# Altium PCB hb.PcbDoc
Units mil, origin at the board's own origin, x right, y up, seen from the top; angles counter-clockwise.
Board outline 6000 x 4000 mil, 2 copper layers (Top Layer, Bottom Layer); 61 components, 62 nets, 221 pads, 20 vias.
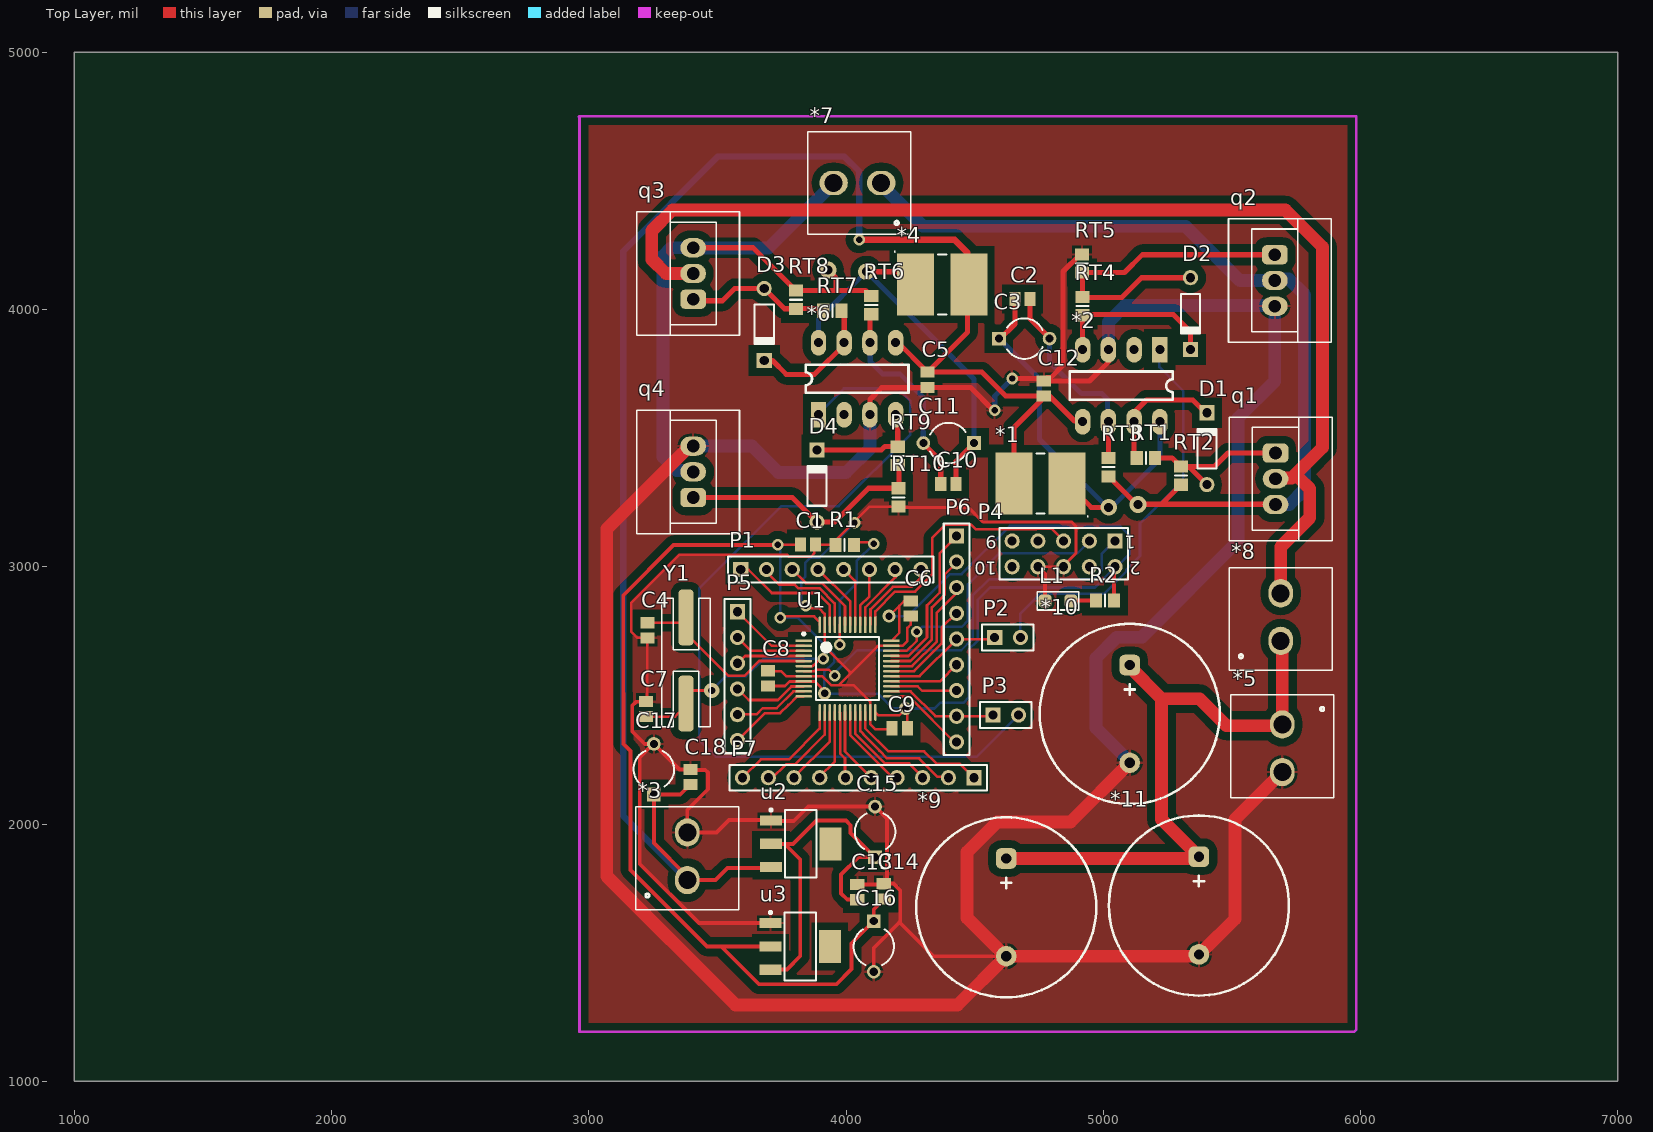
[diagram p0: Top Layer view]
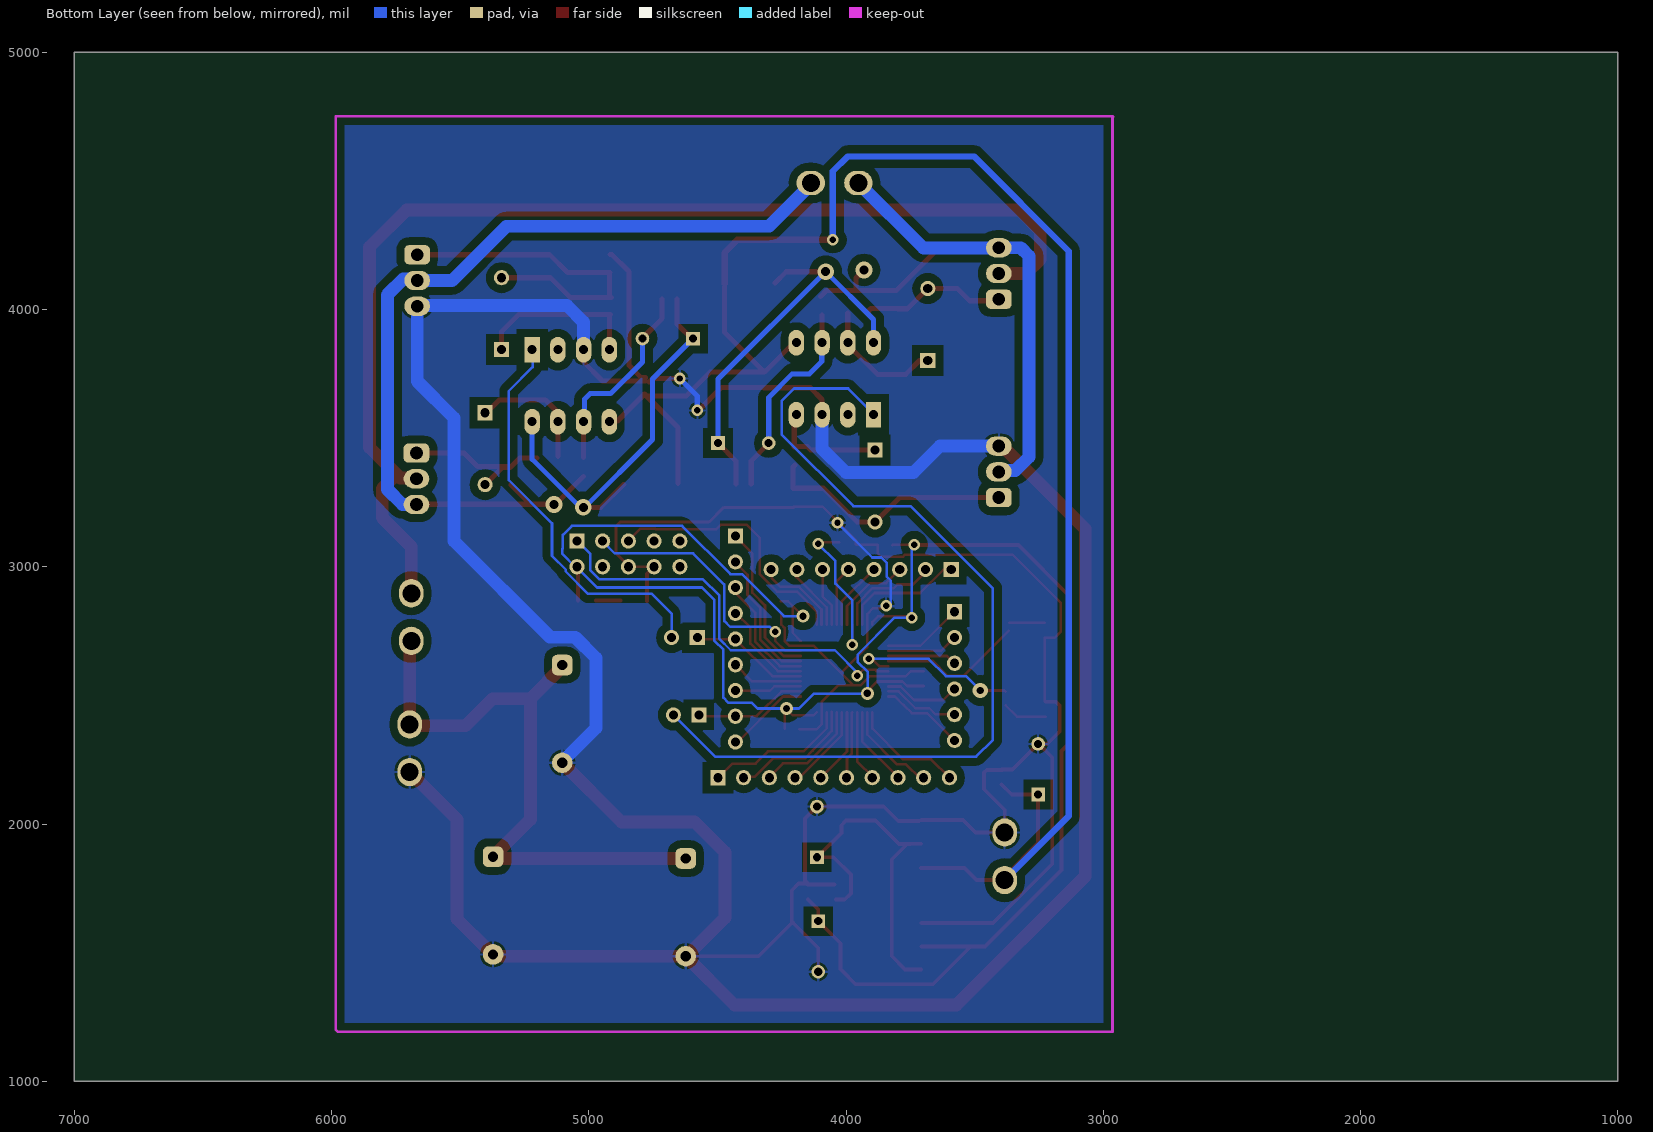
[diagram p1: Bottom Layer view, seen from below]

## Layer stack, top to bottom
Top Solder: solder mask 0.4, Solder Resist, Dk 3.5
Top Layer: signal copper 1.4
Dielectric 1: dielectric 12.6, FR-4, Dk 4.8
Bottom Layer: signal copper 1.4
Bottom Solder: solder mask 0.4, Solder Resist, Dk 3.5

## Board outline
1000,1000 7000,1000 7000,5000 1000,5000

## Design rules (kind name [scope] priority, off if disabled: settings)
Clearance "PolyGon Pour Clearance" [InPolyGon] p1: gap=30
Clearance [All] p2: gap=9
Height [All] p1 off: minheight=0 maxheight=1000 prefheight=500
PolygonConnect [All] p1: connectstyle=Relief reliefconductorwidth=10 reliefentries=4 polygonreliefangle="90 Angle" airgapwidth=10
RoutingVias [All] p1: holewidth=25 width=60 viastyle="Through Hole" minholewidth=25 minwidth=40 maxholewidth=40 maxwidth=80
SolderMaskExpansion [All] p1: expansion=4
UnpouredPolygon [All] p1: allowunpoured=FALSE
Width [All] p1: maxlimit=100 minlimit=10 preferedwidth=20 minimp=50.000000 maximp=50.000000 favimp=50.000000
28 further rules are at their usual default settings.

## Components (designator, comment, footprint, x,y, rotation, side; value= is the part's Value field where it differs from the comment)
*1 "mbrs340t3" "diode mbrs34ot3" 4756,3324 r0 top
*2 "ir2184dip" ir2101 5220,3844 r270 top
*3 "domino2" Domino_2 3383,1792 r90 top
*4 "mbrs340t3" "diode mbrs34ot3" 4374,4097 r180 top
*5 "domino2" Domino_2 5696,2377 r270 top
*6 "ir2184dip" ir2101 3893,3591 r90 top
*7 "domino2" Domino_2 4127,4492 r180 top
*8 "domino2" Domino_2 5690,2722 r90 top
*9 "cap_400v" cap_dip_9mm 4623,1486 r90 top
*10 "cap_400v" cap_dip_9mm 5103,2238 r90 top
*11 "cap_400v" cap_dip_9mm 5372,1493 r90 top
C1 "Cap Pol3" C0805 3852,3086 r0 top
C2 "Cap Pol3" C0805 4686,4041 r0 top
C3 "Cap2" CAPR5-4X5 4693,3887 r0 top
C4 "Cap Pol3" C0805 3228,2753 r270 top
C5 "Cap Pol3" C0805 4317,3727 r270 top
C6 "Cap Pol3" C0805 4252,2838 r270 top
C7 "Cap Pol3" C0805 3223,2447 r90 top
C8 "Cap Pol3" C0805 3697,2566 r90 top
C9 "Cap Pol3" C0805 4209,2372 r180 top
C10 "Cap Pol3" C0805 4398,3322 r180 top
C11 "Cap2" CAPR5-4X5 4399,3481 r180 top
C12 "Cap Pol3" C0805 4769,3693 r90 top
C13 "Cap Pol3" C0805 4044,1735 r90 top
C14 "Cap Pol3" C0805 4147,1738 r90 top
C15 "Cap2" CAPR5-4X5 4113,1969 r90 top
C16 "Cap2" CAPR5-4X5 4108,1524 r270 top
C17 "Cap2" CAPR5-4X5 3253,2213 r90 top
C18 "Cap Pol3" C0805 3396,2183 r90 top
D1 "Diode 1N4148" DO-35 5403,3459 r90 top
D2 "Diode 1N4148" DO-35 5339,3984 r270 top
D3 "Diode 1N4148" DO-35 3682,3942 r270 top
D4 "Diode 1N4148" DO-35 3887,3314 r90 top
L1 "led_smd" led_smd 4824,2867 r180 top
P1 "Header 8" HDR1X8 3591,2989 r0 top
P2 "Header 2" HDR1X2 4578,2725 r0 top
P3 "Header 2" HDR1X2 4571,2424 r0 top
P4 "Header 5X2" HDR2X5 5046,3100 r180 top
P5 "Header 6" HDR1X6 3578,2825 r270 top
P6 "Header 9" HDR1X9 4430,3119 r270 top
P7 "Header 10" HDR1X10 4498,2180 r180 top
q1 "IRF540N" TO220 5670,3342 r270 top
q2 "IRF540N" TO220 5667,4113 r270 top
q3 "IRF540N" TO220 3406,4140 r90 top
q4 "IRF540N" TO220 3406,3369 r90 top
R1 "" 6-0805_N 3995,3085 r180 top
R2 "" 6-0805_N 5007,2869 r0 top
RT1 "10->1 ohm" 6-0805_N 5166,3423 r180 top
RT2 "1k" 6-0805_N 5302,3354 r90 top
RT3 "10->1 ohm" 6-0805_N 5021,3387 r90 top
RT4 "10->1 ohm" 6-0805_N 4919,4013 r270 top
RT5 "1k" 6-0805_N 4918,4179 r270 top
RT6 "10->1 ohm" 6-0805_N 4098,4017 r270 top
RT7 "10->1 ohm" 6-0805_N 3947,3995 r0 top
RT8 "1k" 6-0805_N 3805,4038 r270 top
RT9 "10->1 ohm" 6-0805_N 4201,3431 r90 top
RT10 "1k" 6-0805_N 4204,3270 r90 top
U1 "stm32f103c8t6" LQFP48_stm32 4006,2604 r0 top
u2 "ASM1117-5" SOT223 3824,1923 r0 top
u3 "ASM1117-3.3" SOT223 3822,1524 r0 top
Y1 "XTAL" xtal_smd 3378,2803 r270 top

## Footprints (in the part's own frame and the unit in brackets; to place one, negate y for a bottom-side part, rotate by r counter-clockwise, add the part's x,y. Pads: shape width x height; smd on the part's side, far side on the other; paste and mask are expansions set on the pad)
6-0805_N [mm] "Chip Resistor, Body 2.0x1.2mm, IPC Medium Density"
  rect 1.2x1.4 smd: 1(-0.9,0) 2(0.9,0)
  silkscreen extent 0,-0.6 0,0.6, body extent -1.07,-0.7 1.07,0.7, height 0.7
C0805 [mm] "Chip Capacitor, Body 2.0x1.3mm, IPC High Density"
  rect 1.1x1.4 smd: 1(-0.75,0) 2(0.75,0)
  body extent -1.1,-0.72 1.1,0.72, height 1.4
cap_dip_9mm [mil]
  rrect50% 80x80 hole 40: 1(380,0)
  round 80 hole 40: 2(0,0)
  silkscreen extent -160,-350 540,350
CAPR5-4X5 [mm] "Capacitor; 2 Leads"
  rect 1.35x1.35 hole 0.8: 1(-2.5,0)
  round 1.35 hole 0.8: 2(2.5,0)
  silkscreen extent -1.69,-2 1.82,2
"diode mbrs34ot3" [mm] "Chip Diode, 2-Leads, Body 7,94x5,84mm, IPC Medium Density"
  rect 3.65x6.1 smd: 1(-2.625,0) 2(2.625,0)
  silkscreen extent -0.4,-3.31 4.71,2.95, body extent -4.07,-3.05 4.06,3.05, height 2
DO-35 [mm] "Diode, Axial; Body 3.8 x 1.9 mm (LxDia. max), Lead Dia. 0.53 mm (max)"
  round 1.5 hole 0.9: 1(-3.55,0)
  rect 1.5x1.5 hole 0.9: 2(3.55,0)
  silkscreen extent -1.95,-0.95 2.05,0.95
Domino_2 [mil]
  oval 110x95 hole 70: 1(-10,0) 2(175,0)
  silkscreen extent -125,-200 275,200
HDR1X2 [mm] "Connector; Header; 2 Position"
  rect 1.5x1.5 hole 0.9: 1(0,0)
  round 1.5 hole 0.9: 2(2.54,0)
  silkscreen extent -1.27,-1.27 3.81,1.27
HDR1X6 [mm] "Connector; Header; 6 Position"
  rect 1.5x1.5 hole 0.9: 1(0,0)
  round 1.5 hole 0.9: 2(2.54,0) 3(5.08,0) 4(7.62,0) 5(10.16,0) 6(12.7,0)
  silkscreen extent -1.27,-1.27 13.97,1.27
HDR1X8 [mm] "Connector; Header; 8 Position"
  rect 1.5x1.5 hole 0.9: 1(0,0)
  round 1.5 hole 0.9: 2(2.54,0) 3(5.08,0) 4(7.62,0) 5(10.16,0) 6(12.7,0) 7(15.24,0) 8(17.78,0)
  silkscreen extent -1.27,-1.27 19.05,1.27
HDR1X9 [mm] "Connector; Header; 9 Position"
  rect 1.5x1.5 hole 0.9: 1(0,0)
  round 1.5 hole 0.9: 2(2.54,0) 3(5.08,0) 4(7.62,0) 5(10.16,0) 6(12.7,0) 7(15.24,0) 8(17.78,0) 9(20.32,0)
  silkscreen extent -1.27,-1.27 21.59,1.27
HDR1X10 [mm] "Connector; Header; 10 Position"
  rect 1.5x1.5 hole 0.9: 1(0,0)
  round 1.5 hole 0.9: 2(2.54,0) 3(5.08,0) 4(7.62,0) 5(10.16,0) 6(12.7,0) 7(15.24,0) 8(17.78,0) 9(20.32,0) 10(22.86,0)
  silkscreen extent -1.27,-1.27 24.13,1.27
HDR2X5 [mm] "Connector; Header; 5x2 Position"
  rect 1.5x1.5 hole 0.9: 1(0,0)
  round 1.5 hole 0.9: 2(0,2.54) 3(2.54,0) 4(2.54,2.54) 5(5.08,0) 6(5.08,2.54) 7(7.62,0) 8(7.62,2.54) 9(10.16,0) 10(10.16,2.54)
  silkscreen extent -1.27,-1.27 11.43,3.81
ir2101 [mil]
  rect 100x60 hole 35: 1(0,0)
  oval 100x60 hole 35: 2(0,-100) 3(0,-200) 4(0,-300) 5(280,-300) 6(280,-200) 7(280,-100) 8(280,0)
  silkscreen extent 85,-350 195,50
led_smd [mil]
  rrect50% 50x50 smd: 1(-50,0) 2(50,0)
  silkscreen extent -80,-35 80,35
LQFP48_stm32 [mm] "TSQFP, 48-Leads, Body 7.00x7.00mm, Pitch 0.50mm, IPC High Density"
  rect 1.65x0.25 smd: 1(-4.325,2.75)
  oval 1.65x0.25 smd: 2(-4.325,2.25) 3(-4.325,1.75) 4(-4.325,1.25) 5(-4.325,0.75) 6(-4.325,0.25) 7(-4.325,-0.25) 8(-4.325,-0.75) 9(-4.325,-1.25) 10(-4.325,-1.75) 11(-4.325,-2.25) 12(-4.325,-2.75) 25(4.325,-2.75) 26(4.325,-2.25) 27(4.325,-1.75) 28(4.325,-1.25) 29(4.325,-0.75) 30(4.325,-0.25) 31(4.325,0.25) 32(4.325,0.75) 33(4.325,1.25) 34(4.325,1.75) 35(4.325,2.25) 36(4.325,2.75)
  oval 0.25x1.65 smd: 13(-2.75,-4.325) 14(-2.25,-4.325) 15(-1.75,-4.325) 16(-1.25,-4.325) 17(-0.75,-4.325) 18(-0.25,-4.325) 19(0.25,-4.325) 20(0.75,-4.325) 21(1.25,-4.325) 22(1.75,-4.325) 23(2.25,-4.325) 24(2.75,-4.325) 37(2.75,4.325) 38(2.25,4.325) 39(1.75,4.325) 40(1.25,4.325) 41(0.75,4.325) 42(0.25,4.325) 43(-0.25,4.325) 44(-0.75,4.325) 45(-1.25,4.325) 46(-1.75,4.325) 47(-2.25,4.325) 48(-2.75,4.325)
  silkscreen extent -4.45,-3.1 3.1,3.55, body extent -3.5,-3.5 3.5,3.5, height 1.6
SOT223 [mm] "SOT223, 4-Leads, Body 6.50x7.00mm (avg), Pitch 2.30mm, IPC Medium Density"
  rect 2.15x1 smd: 1(-2.93,2.3) 2(-2.93,0) 3(-2.93,-2.3)
  rect 2.15x3.25 smd: 4(2.93,0)
  silkscreen extent -3.05,-3.35 1.55,3.47, body extent -1.86,-3.35 1.86,3.35, height 1.8
TO220 [mil]
  rrect50% 75x100 hole 50: 1(-100,0)
  oval 75x100 hole 50: 2(0,0) 3(100,0)
  silkscreen extent -240,-180 240,220
xtal_smd [mil]
  rrect50% 217x59 smd: 1(0,0) 2(335,0)
  silkscreen extent -75,-95 425,95

## Part data
C1 C2 C4 C5 C6 C7 C8 C9 C10 C12 C13 C14 C18: "Polarized Capacitor (Surface Mount)"
C3 C11 C15 C16 C17: "Capacitor"
D1 D2 D3 D4: "High Conductance Fast Diode"
P1: "Header, 8-Pin"
P2 P3: "Header, 2-Pin"
P4: "Header, 5-Pin, Dual row"
P5: "Header, 6-Pin"
P6: "Header, 9-Pin"
P7: "Header, 10-Pin"
R1 R2 RT1 RT2 RT3 RT4 RT5 RT6 RT7 RT8 RT9 RT10: library part "Res Thermal", "Thermistor"
u3: library part ASM1117-5

## Via types
v1: diameter 45, hole 25, Top Layer to Bottom Layer, 12 vias
v2: diameter 65, hole 35, Top Layer to Bottom Layer, 4 vias
v3: diameter 50, hole 28, Top Layer to Bottom Layer, 3 vias
v4: diameter 60, hole 28, Top Layer to Bottom Layer, 1 vias

## Nets (pads, with @x,y where several pads share a name; then routed paths per layer and width w, separated by ;. In a path a pad name is that pad's centre, name@x,y a point inside that pad or via, vN(x,y) a via of type N, cw(c..) or ccw(c..) an arc to the next point about the centre after c; other vN are vias at no path point)
3V: C1.1 C6.1 C8.1 C9.1 C14.1 C16.1 P4.2 R2.2 U1.9 U1.24 U1.36 U1.48 u3.2 | length 8014.3
  Top Layer w10: C8.1 3762.6,2536.47 3780.23,2554.1 3878.9,2554.1 v3@3923,2510 ; v1(3735,3086) 3818,3086 C1.1@3820,3084 ; v1(3744,2802) 3749,2807 3876,2807 3897.73,2785.27 U1.48 ; U1.24 4125.99,2422 4207,2422 4235,2450 4238,2447 C9.1@4238,2370 ; v3(4167,2808) 4207,2848 ; U1.36 4207,2742.99 4207,2848 ; C6.1@4253,2866 4225,2866 4207,2848
  Top Layer w15: 3516,1523 3662,1377 3963,1377 4022,1436 4022,1536.42 C16.1 4108,1667 C14.1@4148,1707 ; u3.2 3459,1524 3162,1821 3162,2284 3135,2311 3135,2508 3134,2509 3134,2888 3330,3084 v1@3738,3084 ; R2.2 P4.2@5042.43,2993.43
  Bottom Layer w10: v1(3735,3086) 3744,3077 v1(3744,2802) 3811,2802 3955,2658 3955,2630 3915,2590 v3@3915,2512 ; v3@3913,2507 4125,2507 4183,2449 v3(4231,2449) 4344,2449 4367,2472 4458,2472 4477,2491 4477,2677.57 4511.53,2712.1 4511.53,2870.53 4560.44,2919.43 4967.44,2919.43 P4.2@5049,3001 ; v3(4167,2808) 4241,2808 4404,2971 4449,2971 4637,3159 5065.85,3159 5101,3123.85 5101,3071.46 5103,3069.46 5103,3050 5055,3002 P4.2@5049,3002
  other v3: 3917,2508
5V: C13.1 C15.1 u2.2 u3.3 | length 1415.6
  Top Layer w15: u3.3@3708,1435 3770,1435 3822,1487 3822,1862 3762,1922 ; u2.2 3751,1923 ; 3751,1922 3762,1922 ; C13.1@4040,1706 4005,1706 3981,1730 3981,1803 4048.57,1870.57 C15.1 4018,1965.57 4018,1995 4000,2013 3885,2013 3794,1922 3762,1922
12V: *1.1 *2.5 *3.1 *4.1 *6.5 C5.1 C12.1 C17.1 C18.1 u2.3 | length 7003.9
  Top Layer w15: *3.1@3381,1778 3381,1798 3253,1926 C17.1 3355.57,2114.57 C18.1@3395,2154 ; *3.1 3492,1782 3539,1829 u2.3@3708,1829
  Top Layer w20: *6.5@4199,3875 4199,3874.53 C5.1 ; *4.1@4473,4087 4473,3912.53 C5.1 ; *1.1 4652.65,3541.65 4783,3672 4888,3567 *2.5@4924,3567 ; C12.1@4772,3664 4621,3664 4528.47,3756.53 C5.1
  Top Layer w25: v1(4051,4271) 4422,4271 4472,4221 *4.1@4472,4101
  Bottom Layer w25: *3.1 3134,2031 3134,4227 3502,4595 3993,4595 4051,4537 v1(4051,4271)
220V: *5.1 *8.1 *9.1 *10.1 *11.1 | length 2439.6
  Top Layer w50: *9.1 *11.1@5369,1866 ; *10.1@5099,2615 5227,2487 ; *11.1 5227,2018 5227,2487 ; *5.1 *8.1@5696,2711 ; *5.1@5698,2382 5479,2382 5374,2487 5227,2487
GND: *2.3 *3.2 *5.2 *6.3 *9.2 *10.2 *11.2 C1.2 C4.2 C5.2 C6.2 C7.2 C8.2 C9.2 C12.2 C13.2 C14.2 C15.2 C16.2 C17.2 C18.2 L1.2 P4.6 P4.8 q2.3 q4.3 R1.2 RT5.1 RT10.1 U1.8 U1.23 U1.35 U1.47 u2.1 u3.1 | length 20785
  Top Layer w10: C7.2@3228,2480 C4.2 3189.03,2723.47 3165,2747.5 3165,2859 3353,3047 3770,3047 3778,3039 3863,3039 3877,3053 C1.2@3877,3086 ; C8.2@3698,2594 3748,2594 3767.53,2574.47 U1.8 3906.91,2574.47 3941.88,2539.5 3972.12,2539.5 3993.5,2560.88 3993.5,2561.5 4124.58,2692.58 U1.35 4219.58,2692.58 4238.5,2711.5 4238.5,2762.12 4251,2774.62 C6.2@4251,2812 ; v1(3843.69,2848) 3852.69,2839 3894.28,2839 3916.73,2816.55 3916.73,2774.96 U1.47 ; C1.2@3883,3085 R1.2 ; U1.47@3918,2775 3918,2687.62 4018.62,2587 ; R1.2@3962,3100 3962,3087 3960,3085 R1.2 ; 3974,2539 4030.9,2539 4093.9,2476 4093.9,2434.41 U1.23 4094.58,2387.42 4113,2369 C9.2@4182,2369 ; RT10.1@4205,3234 4091,3234 3959.57,3102.57 R1.2 ; P4.8@4747,3000 P4.6@4841,3000 ; P4.6 P4.6@4852,3000
  Top Layer w12: RT10.1@4203,3231 4475,3231 4532,3174 4878,3174 4894,3158 4894,3053 4846,3005 P4.6
  Top Layer w15: C7.2@3225,2475 3183,2475 3169,2461 3169,2360 3217.57,2311.43 C17.2@3250.43,2311.43 ; C17.2 C17.2@3250.43,2311.43 ; C18.2@3391,2210 3453,2210 3463,2200 3463,2135 3383,2055 *3.2 3496,1967 3545,2016 u2.1@3707,2016 ; C18.2 3352.47,2212.53 3252,2313 C17.2@3250.43,2311.43 ; u3.1 3428.45,1614.55 3198,1845 3198,2259 C17.2@3250.43,2311.43 ; u2.1@3716,2011 3797,2011 3853.43,2067.43 C15.2 4159,2021.43 4159,1781 C14.2@4145,1767 ; C13.2 C14.2@4149.53,1764.53 ; C16.2 4108,1518 4208,1618 ; C14.2@4150,1768 4184,1768 4211,1741 4211,1621 4208,1618 ; 4207,1619 4208,1618 ; *9.2 4340,1486 4208,1618 ; P4.8@4743,3004 4747,3000 4774,2973 L1.2
  Top Layer w20: *6.3 4093,3650 4139,3696 C5.2@4318,3696 ; C5.2 4483.53,3697.47 4573,3608 v1(4578,3608) ; v1(4646,3732) 4751,3732 C12.2@4765,3718 ; C12.2@4779,3722.53 4946.53,3722.53 5023,3799 *2.3@5023,3843 ; C12.2@4779,3735 4796,3735 4844,3783 4844,4147.62 4910.81,4214.43 RT5.1
  Top Layer w50: q4.3@3414,3468 3410,3472 3395,3472 3070,3147 3070,1797 3571,1296 4433,1296 *9.2 *11.2@5372,1486 ; *9.2@4617,1489 4471,1635 4471,1891 4588,2008 4873,2008 *10.2 ; *11.2@5389,1508 5512,1631 5512,2018 *5.2
  Bottom Layer w10: v1(3843.69,2848) 3826,2848 3826,2946 3841,2961 3841,3015 3862,3036 3898,3036 v1(4033,3171)
  Bottom Layer w20: v1(4578,3608) 4578,3664 v1(4646,3732)
  Bottom Layer w50: q4.3 3635,3469 3738,3366 4000,3366 4094,3460 *6.3@4094,3594 ; *2.3 5020,3951 5085,4016 q2.3@5671,4016 ; *10.2@5116,2229 4972,2373 4972,2645 5053,2726 5150,2726 5524,3100 5524,3578 5667,3721 q2.3
HO1: *2.7 D1.2 RT1.2 | length 497.7
  Top Layer w20: RT1.2@5120,3428 *2.7 5120,3600 5168,3648 5348,3648 D1.2@5403,3593
HO2: *6.7 D3.2 RT7.2 | length 504.6
  Top Layer w20: D3.2 3713.76,3802.24 3768,3748 3878,3748 *6.7@3999,3869 ; *6.7 RT7.2@3993,3986
IN1: *2.1 P2.2 | length 1564.7
  Bottom Layer w10: P2.2 4678,2818 4755,2895 5002.56,2895 5089.53,2981.97 5089.53,2988.53 5143,3042 5143,3169 5311,3337 5311,3683 5218,3776 *2.1@5218,3844
IN2: *6.1 P3.2 | length 3539.2
  Bottom Layer w10: *6.1@3895,3596 3992,3693 4202,3693 4250,3645 4250,3515 3971,3236 3749,3236 3429,2916 3429,2327 3494,2262 4509,2262 P3.2
IN_H_BRID: *8.2 q1.2 q3.2 | length 4520.5
  Top Layer w50: q3.2 3300,4140 3245,4195 3245,4306 3326,4387 5708,4387 5852,4243 5852,3464 5733,3345 q1.2@5667,3345 ; *8.2 5690,3078 5803,3191 5803,3303 5761,3345
LO1: *2.4 D2.2 RT4.2 | length 654.5
  Top Layer w20: RT4.2@4915,3981 5272,3981 5339,3914 D2.2 ; *2.4 RT4.2@4920,3977
LO2: *6.4 D4.2 RT9.2 | length 447.8
  Top Layer w20: D4.2 4136.76,3453.76 4151,3468 RT9.2@4199,3468 ; *6.4@4188,3591 4201,3578 RT9.2
Net*1_2: *1.2 *2.8 C2.1 C3.1 | length 1622.9
  Top Layer w20: C3.1@4596,3883 4656.47,3943.47 C2.1 ; *1.2@4864,3320 4953,3231 v2(5021,3231)
  Bottom Layer w20: C3.1 4752,3729.57 4752,3495 5016,3231 v2(5021,3231) ; v2@5033,3231 5220,3418 *2.8
Net*2_6: *2.6 C2.2 C3.2 RT3.2 | length 781
  Top Layer w20: C2.2 4715.53,3964.47 C3.2@4793,3887 ; RT3.2@5020,3426 *2.6
  Bottom Layer w20: C3.2 4791.43,3796.57 4915,3673 4995,3673 5016,3652 *2.6@5016,3570
Net*4_2: *4.2 *6.8 C10.1 C11.1 | length 1598.2
  Top Layer w20: v2(4079,4147) 4232,4147 *4.2@4276,4103 ; C10.1 4427.53,3410.53 C11.1@4497,3480
  Bottom Layer w20: *6.8 3893,3961 v2(4079,4147) ; v2@4077,4150 4497.43,3729.57 C11.1
Net*6_6: *6.6 C10.2 C11.2 RT6.2 | length 806.8
  Top Layer w20: *6.6 RT6.2@4093,3979 ; C11.2@4302,3478 4368.47,3411.53 C10.2
  Bottom Layer w20: *6.6 4094,3870 4094,3798 4142,3750 4209,3750 4300.57,3658.43 C11.2
NetC4_1: C4.1 U1.5 Y1.1 | length 701.5
  Top Layer w10: C4.1 Y1.1@3364.53,2782.53 ; Y1.1@3368,2751 3543,2576 3558.5,2576 3559.5,2577 3567.75,2576 3582.25,2576 3588.5,2577 3589.5,2576 3605,2576 3662.53,2633.53 U1.5
NetC7_1: C7.1 U1.6 Y1.2 | length 846.6
  Top Layer w10: C7.1 3335.47,2417.47 Y1.2@3379,2461 ; Y1.2@3380,2515 3384,2519 v4(3478,2519) ; U1.6 3869.18,2613.84 3869.94,2614.61 3871.12,2614.61 3898.51,2642 v1(3912,2642)
  Bottom Layer w10: v4(3478,2519) 3534,2575 3612,2575 3679,2642 v1(3912,2642)
NetD1_1: D1.1 q1.1 RT1.1 RT2.2 | length 629.9
  Top Layer w20: RT1.1 5268,3423 RT2.2@5303,3388 ; RT2.2 5432.43,3389.43 5485,3442 q1.1@5669,3442 ; RT2.2@5306,3387 5335.24,3387 D1.1
Netd2_1: D2.1 q2.1 RT4.1 RT5.2 | length 1330.7
  Top Layer w20: RT4.1@4911,4047 5072,4047 5148.76,4123.76 D2.1 ; RT5.2 RT5.2@4919,4143.57 ; RT4.1 RT5.2@4919,4143.57 ; q2.1@5665,4213 5152,4213 5082.57,4143.57 RT5.2@4919,4143.57
Netd3_1: D3.1 q3.1 RT7.1 RT8.2 | length 555.7
  Top Layer w20: q3.1@3406,4034 3520,4034 3567.76,4081.76 D3.1 3760.76,4003 RT8.2@3800,4003 ; RT8.2@3806,4004 3902.57,4004 RT7.1
Netd4_1: D4.1 q4.1 RT9.1 RT10.2 | length 987.3
  Top Layer w20: q4.1 3791,3269 3886,3174 3956,3174 4087,3305 4205,3305 4206,3306 4206,3388 RT9.1@4198,3396
NetL1_1: L1.1 R2.1 | length 94.6
  Top Layer w15: L1.1@4877,2869 R2.1
NetR1_1: R1.1 U1.44 | length 607.2
  Top Layer w10: v1(3976.47,2697.53) U1.44 ; R1.1@4026,3095 4102,3095 v1(4108,3089)
  Bottom Layer w10: v1(3976.47,2697.53) 3976.47,2870.47 4041,2935 4041,3022 v1(4108,3089)
NRST: P4.1 U1.7 | length 1589.8
  Top Layer w10: U1.7 3882.2,2594.16 3882.2,2598.82 3883.38,2600 3933,2600 v1(3957,2576)
  Bottom Layer w10: v1(3957,2576) 3957,2577 3951,2583 4043.47,2675.47 4448.03,2675.47 4492.53,2719.97 4492.53,2887.53 4557,2952 4959.56,2952 4995,2987.44 4995,3051 P4.1@5045,3101
PA0: P5.4 U1.10 | length 296.5
  Top Layer w10: P5.4@3579,2525 3622,2482 3735,2482 3787.42,2534.42 3835.04,2534.42 U1.10
PA1: P5.5 U1.11 | length 293.8
  Top Layer w10: P5.5@3579,2426 3652,2426 3676,2450 3729.87,2450 3795.29,2515.42 U1.11
PA2: P5.6 U1.12 | length 327.4
  Top Layer w10: P5.6@3579,2325 3685,2431 3744,2431 3776.49,2463.49 3777.49,2463.49 3809.73,2495.73 U1.12
PA3: P7.10 U1.13 | length 441.7
  Top Layer w10: P7.10 3669,2251 3778,2251 3897.73,2370.73 U1.13
PA4: P7.9 U1.14 | length 376.7
  Top Layer w10: P7.9@3698,2176 3711,2176 3767,2232 3802,2232 3917.42,2347.42 U1.14
PA5: P7.8 U1.15 | length 309.3
  Top Layer w10: P7.8@3798,2182 3937.1,2321.1 U1.15
PA6: P7.7 U1.16 | length 277.3
  Top Layer w10: P7.7@3895,2182 3956.79,2243.79 U1.16
PA7: P7.6 U1.17 | length 262.5
  Top Layer w10: U1.17 3977.16,2433.04 3977.16,2273.97 3996,2255.13 3996,2185 P7.6@4000,2181
PA8: P2.1 P6.5 U1.29 | length 457.6
  Top Layer w10: U1.29 4286.47,2574.47 P6.5@4431,2719 ; P6.5 P6.5@4431,2719 ; P2.1@4573,2719 P6.5@4431,2719
PA9: P6.4 U1.30 | length 380.5
  Top Layer w10: U1.30 4264.64,2594.16 4372,2701.52 4372,2764 P6.4@4427,2819
PA10: P6.3 U1.31 | length 461.4
  Top Layer w10: U1.31 4257.45,2613.84 4353,2709.39 4353,2822 4429,2898 P6.3@4429,2923
PA11: P6.2 U1.32 | length 532.3
  Top Layer w10: U1.32 4250.27,2633.53 4334,2717.26 4334,2842 4383,2891 4383,2969 P6.2@4431,3017
PA12: P6.1 U1.33 | length 609
  Top Layer w10: U1.33 4243.08,2653.21 4315,2725.13 4315,2850 4364,2899 4364,3052 P6.1@4430,3118
PA15: P1.8 U1.38 | length 338.9
  Top Layer w10: U1.38 4095.27,2774.96 4095.27,2834.6 4182.85,2922.18 4254,2922.18 4289,2957.18 P1.8@4289,2991
PB0: P7.5 U1.18 | length 297.3
  Top Layer w10: U1.18 3996.16,2281.84 P7.5 P7.5@4099,2179
PB1: P7.4 U1.19 | length 339.8
  Top Layer w10: U1.19 4015.84,2345.42 4183.26,2178 P7.4@4198,2178
PB2: P7.3 U1.20 | length 416.7
  Top Layer w10: U1.20 4035.53,2352.6 4152.13,2236 4245,2236 P7.3@4300,2181
PB3: P1.7 U1.39 | length 263.6
  Top Layer w10: U1.39 4074.9,2841.9 4193,2960 P1.7@4193,2989
PB4: P1.6 U1.40 | length 231.5
  Top Layer w10: U1.40 4055.21,2849.08 4091,2884.87 P1.6 P1.6@4091,2991
PB5: P1.5 U1.41 | length 232.8
  Top Layer w10: P1.5@3992,2989 4035.53,2945.47 U1.41
PB6: P1.4 U1.42 | length 267
  Top Layer w10: P1.4@3892,2990 4015.84,2866.16 U1.42
PB7: P1.3 U1.43 | length 338
  Top Layer w10: P1.3@3790,2990 P1.3 3844,2936 3907,2936 3996.16,2846.84 U1.43
PB8: P1.2 U1.45 | length 407.2
  Top Layer w10: P1.2@3687,2984 3740,2931 3800.06,2931 3814.06,2917 3897,2917 3956,2858 3956,2835 ; U1.45 3956.79,2837.21
PB9: P1.1 U1.46 | length 480
  Top Layer w10: P1.1@3590,2988 3622,2988 3712,2898 3889.13,2898 3937,2850.13 3937,2774.38 U1.46
PB10: P7.2 U1.21 | length 493.9
  Top Layer w10: U1.21@4055.9,2436 4055.9,2361.1 4067.48,2349.52 4067.48,2348.52 4129.49,2286.51 4129.49,2285.51 4160,2255 4284.56,2255 4356.56,2183 P7.2@4400,2183
PB11: P7.1 U1.22 | length 566.1
  Top Layer w10: U1.22 4074.9,2372.1 4165,2282 4304,2282 4351,2235 4442,2235 P7.1@4499,2178
PB12: P6.9 U1.25 | length 327.8
  Top Layer w10: U1.25 4244.27,2495.73 P6.9@4428,2312
PB13: P3.1 P6.8 U1.26 | length 433.7
  Top Layer w10: U1.26 4251.45,2515.42 4347.87,2419 P6.8 P3.1@4570,2419
PB14: P6.7 U1.27 | length 262.8
  Top Layer w10: U1.27 4278.9,2535.1 4296,2518 P6.7@4432,2518
PB15: P6.6 U1.28 | length 280.7
  Top Layer w10: U1.28 4364.79,2554.79 P6.6@4430,2620
PC13: P5.1 U1.2 | length 314.4
  Top Layer w10: P5.1@3577,2827 3711.42,2692.58 U1.2
PC14: P5.2 U1.3 | length 279.3
  Top Layer w10: P5.2 3630.1,2672.9 U1.3
PC15: P5.3 U1.4 | length 271.7
  Top Layer w10: P5.3@3577,2622 3608.21,2653.21 U1.4
SWC: P4.5 U1.37 | length 1035.4
  Top Layer w10: U1.37 4114.27,2826.73 4190.72,2903.18 4268.18,2903.18 4336,2971 4336,3113 4387,3164 4486,3164 4504,3146 4740.25,3146 4741.25,3147 4800,3147 P4.5@4847,3100
SWD: P4.3 U1.34 | length 1054.1
  Top Layer w10: U1.34 4235.9,2672.9 4275,2712 v1(4275,2747)
  Bottom Layer w10: v1(4275,2747) 4275,2745 4296,2766 4450,2766 4473,2789 4473,2800.44 4473.53,2800.97 4473.53,2931.53 4594,3052 4899,3052 P4.3@4947,3100
VS1: *7.1 q1.3 q2.2 RT2.1 RT3.1 | length 3548.8
  Top Layer w20: RT3.1 5129.57,3243 5226.43,3243 ; v2@5129,3219 5135,3225 v2(5135,3242) ; RT2.1 5226.43,3243 ; q1.3@5668,3243 5226.43,3243
  Bottom Layer w50: *7.1@4135,4488 4299,4324 5320,4324 5531,4113 q2.2 ; q2.2@5665,4119 5721,4119 5783,4057 5783,3301 5724,3242 q1.3
VS2: *7.2 q3.3 q4.2 RT6.1 RT8.1 | length 2580.1
  Top Layer w20: q3.3@3400,4240 q3.3 3638.43,4240 RT8.1 3961,4073.43 ; v2(3930,4154) 3961,4123 3961,4073.43 ; RT6.1@4099,4050 4075.57,4073.43 3961,4073.43
  Bottom Layer w50: q3.3@3401,4239 3699,4239 *7.2 ; q3.3 3321,4240 3289,4208 3289,3427 3342,3374 q4.2@3409,3374
pads on no net: *2.2 *6.2 P4.4 P4.7 P4.9 P4.10 U1.1 u2.4 u3.4

## Polygon pours and split planes (outlines as drawn)
GND on Top Layer "Keep-Out Layer-No Net" (solid, pour order 6): 2964,4749 2966,4751 5984,4751 5984,1188 5969,1203 2966,1203
GND on Bottom Layer "Keep-Out Layer-No Net" (solid, pour order 8): 2966,4747 5980,4747 5981,4746 5981,1195 2968,1195 2965,1198

## Keep-outs
Keep-Out Layer:
  lines w10: 2962,4750 2964,4748 2964,1226 2964,1193 ; 2963,4751 5984,4751 5983,4750 5983,1200 5975,1192 2999,1192 ; 2968,1192 2997,1192

## Text inside footprints (layer, text, board x,y; h text height)
P4: Top Overlay "2" at 5146,3020 h50 r180; Top Overlay "1" at 5126,3120 h50 r180; Top Overlay "9" at 4586,3120 h50 r180; Top Overlay "10" at 4586,3020 h50 r180